# EAGLE board sensor1 (EAGLE 9.6.2)
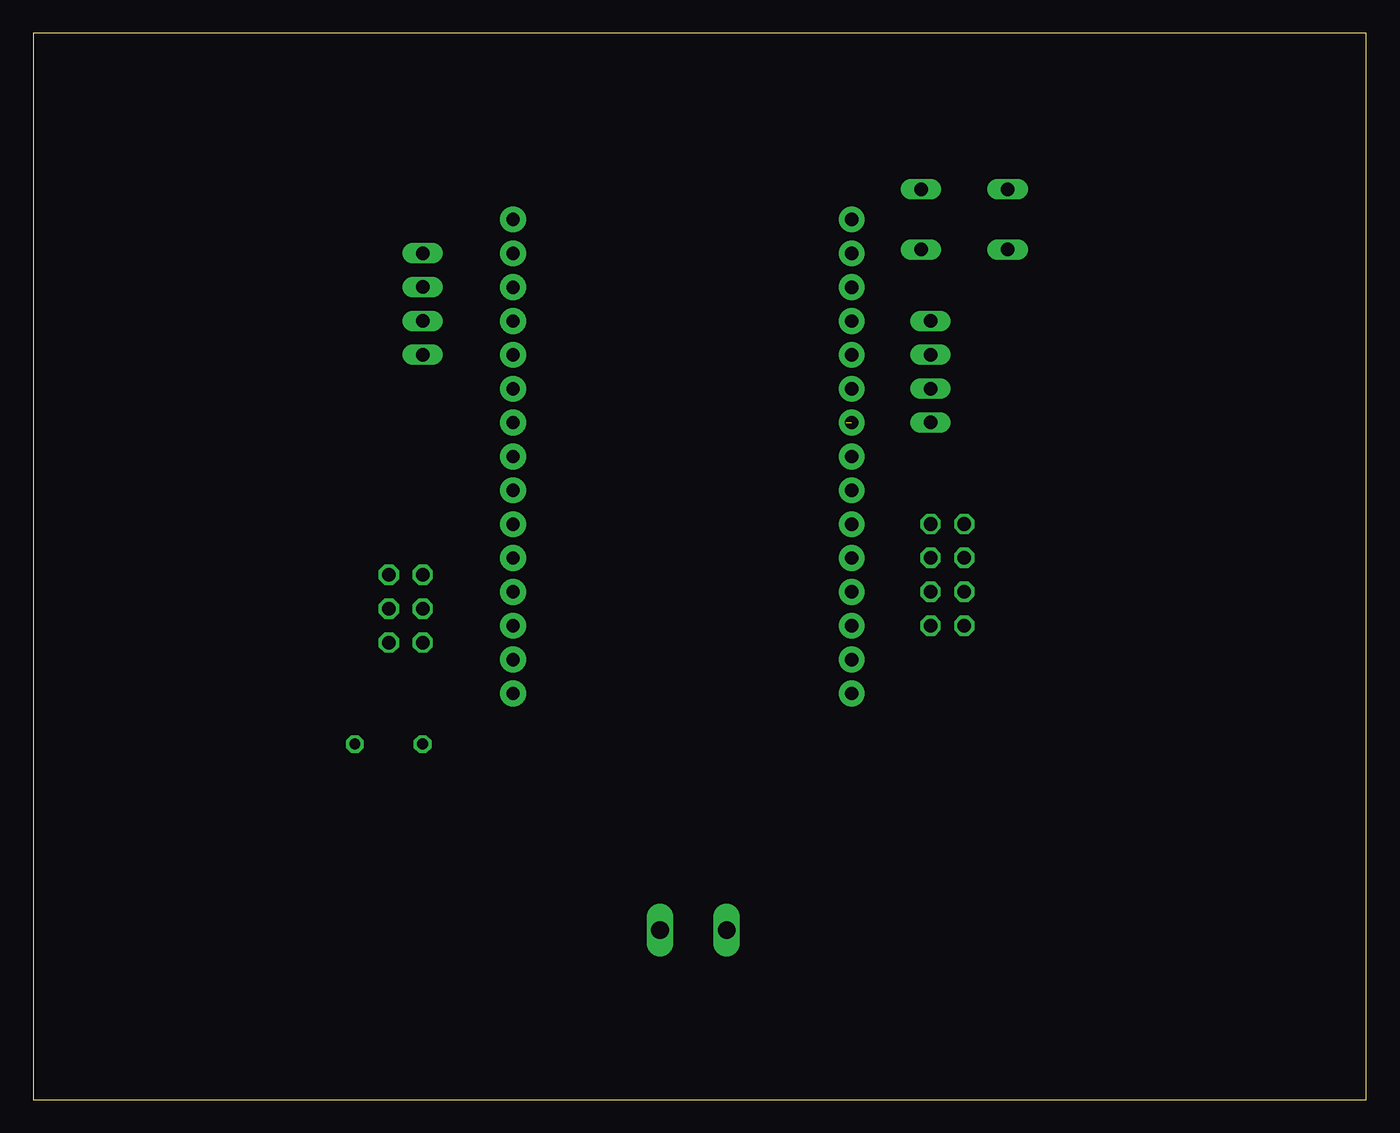
[diagram p0: board, top side]
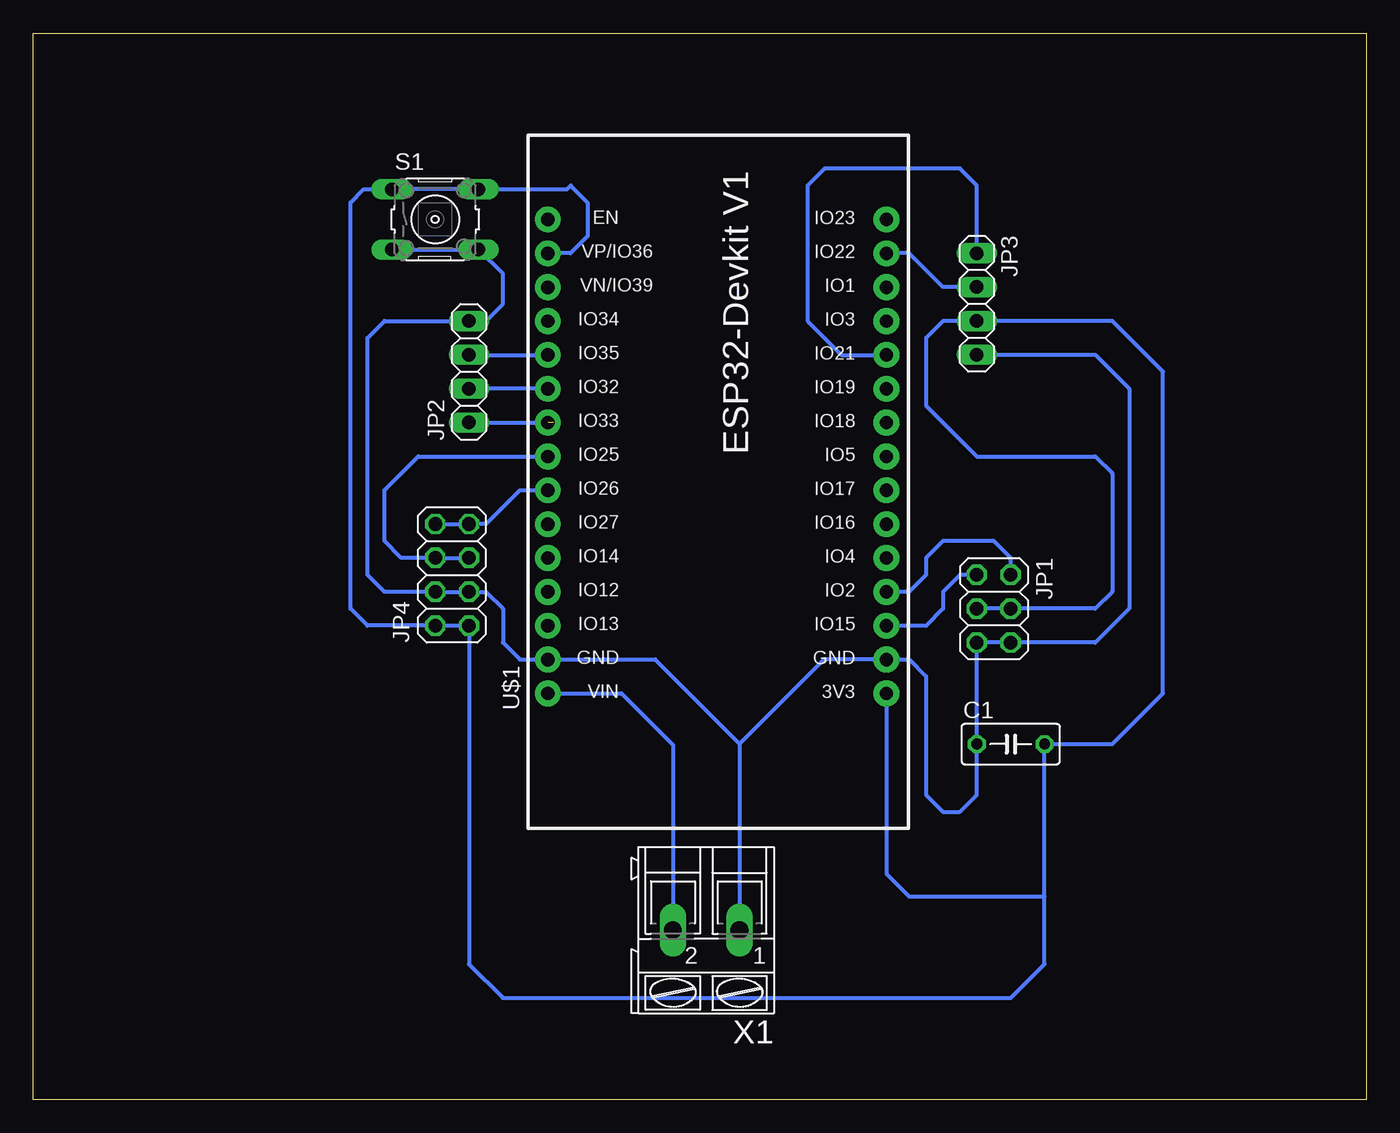
[diagram p1: board, bottom side, seen from below]

Size 100 x 80 mm. Coordinates in mm from the lower left corner, seen from the top.
Outline: 0,0 100,0 100,80 0,80 0,0
Copper layers (1*16): Top 0.035mm / dielectric 1.5mm / Bottom 0.035mm
Design rules "default": minimum track width 6mil, minimum drill 0.35mm, track to track 6mil, track to pad 6mil, pad to pad 6mil, via to via 6mil, smd to smd 6mil, copper to edge 40mil, drill to drill 6mil, minimum pad ring 10mil, minimum via ring 8mil, stop-mask expansion 4mil, vias tented up to drill 0mil, thermal gap 10mil

## Footprints (pad centres in the part's own frame; a part is rotated, then mirrored left to right if it is on the bottom)
C050-030X075 = drill 0.813 octagon: 1 -2.54,0; 2 2.54,0
2X03 = drill 1.016 octagon: 1 -2.54,-1.27; 2 -2.54,1.27; 3 0,-1.27; 4 0,1.27; 5 2.54,-1.27; 6 2.54,1.27
1X04 = drill 1.016 long: 1 -3.81,0; 2 -1.27,0; 3 1.27,0; 4 3.81,0
2X04 = drill 1.016 octagon: 1 -3.81,-1.27; 2 -3.81,1.27; 3 -1.27,-1.27; 4 -1.27,1.27; 5 1.27,-1.27; 6 1.27,1.27; 7 3.81,-1.27; 8 3.81,1.27
B3F-10XX = drill 1.016 long: 1 -3.251,2.261; 2 3.251,2.261; 3 -3.251,-2.261; 4 3.251,-2.261
ESP32-DEVKITV1 = drill 1 pad 1.93: 3V3 -16.52,-12.27; D1 13.96,-12.27; D2 -8.9,-12.27; D3 11.42,-12.27; D4 -6.36,-12.27; D5 1.26,-12.27; D12 -8.9,13.135; D13 -11.44,13.135; D14 -6.36,13.135; D15 -11.44,-12.27; D16 -3.82,-12.27; D17 -1.28,-12.27; D18 3.8,-12.27; D19 6.34,-12.27; D21 8.88,-12.27; D22 16.5,-12.27; D23 19.04,-12.27; D25 1.26,13.135; D26 -1.28,13.135; D27 -3.82,13.135; D32 6.34,13.135; D33 3.8,13.135; D34 11.42,13.135; D35 8.88,13.135; D36 16.5,13.135; D39 13.96,13.135; EN 19.04,13.135; GND@1 -13.98,13.135; GND@2 -13.98,-12.27; VIN -16.52,13.135
AK300/2 = drill 1.321 long: 1 -2.515,0; 2 2.489,0

## Placement (x,y rotation side)
C1  [C050-030X075]  26.67,26.67 0 bottom
JP1  [2X03]  27.94,36.83 270 bottom
JP2  [1X04]  67.31,54.61 90 bottom
JP3  [1X04]  29.21,59.69 270 bottom
JP4  [2X04]  68.58,39.37 90 bottom
S1  [B3F-10XX]  69.85,66.04 0 bottom
U$1  ESP32DEVKITV1  [ESP32-DEVKITV1]  48.26,46.99 90 bottom
X1  [AK300/2]  49.53,12.7 180 bottom

## Library data of the parts
C1 = rcl; SPICEPREFIX: C
JP1-JP4 = pinhead
S1 = switch-omron; MPN: B3F-1000; OC_FARNELL: 176432; OC_NEWARK: 36M3542
U$1 = esp32-devkitv1
X1 = con-ptr500; OC_FARNELL: unknown; OC_NEWARK: unknown

## Nets
GND: C1.1 JP1.5 JP1.6 JP2.4 JP3.4 JP4.3 JP4.4 S1.3 S1.4 U$1.GND@1 U$1.GND@2 X1.1
MOISTURE: JP1.2 U$1.D2
OUT1: JP2.1 U$1.D33
OUT2: JP2.2 U$1.D32
OUT3: JP2.3 U$1.D35
PH: JP1.1 U$1.D15
SCL: JP3.2 U$1.D22
SCL2: JP4.5 JP4.6 U$1.D25
SDA: JP3.1 U$1.D21
SDA2: JP4.7 JP4.8 U$1.D26
V: C1.2 JP1.3 JP1.4 JP3.3 JP4.1 JP4.2 S1.1 S1.2 U$1.3V3 U$1.D36
VIN: U$1.VIN X1.2

## Tracks (layer width: path | path; a pad name or v marks a point on that pad's centre or on a via)
GND
  Bottom 0.305: S1.3 S1.4 64.77,61.95 64.77,59.69 66.04,58.42 JP2.4 73.66,58.42 74.93,57.15 74.93,39.37 73.66,38.1 JP4.4 JP4.3 66.04,38.1 64.77,36.83 64.77,34.29 63.49,33.01 U$1.GND@1 57.16,33.01 57.15,33.02 53.34,33.02 47.02,26.7 47.02,26.67 | 47.02,26.67 X1.1 | 47.02,26.67 40.67,33.01 U$1.GND@2 34.28,33.01 33.02,31.75 33.02,22.86 31.75,21.59 30.48,21.59 29.21,22.86 C1.1 JP1.5 JP1.6 20.32,34.29 17.78,36.83 17.78,53.34 20.32,55.88 JP3.4
MOISTURE
  Bottom 0.305: JP1.2 26.67,40.64 27.94,41.91 31.75,41.91 33.02,40.64 33.02,39.37 34.3,38.09 U$1.D2
OUT1  (1 unrouted)
  Bottom 0.305: JP2.1 60.96,50.8
OUT2
  Bottom 0.305: U$1.D32 61.41,53.34 JP2.2
OUT3
  Bottom 0.305: JP2.3 U$1.D35
PH
  Bottom 0.305: JP1.1 30.48,39.37 31.75,38.1 31.75,36.83 33.03,35.55 U$1.D15
SCL
  Bottom 0.305: JP3.2 31.75,60.96 34.29,63.5 U$1.D22
SCL2
  Bottom 0.305: JP4.5 JP4.6 72.39,40.64 73.66,41.91 73.66,45.72 71.12,48.26 61.41,48.26 U$1.D25
SDA
  Bottom 0.305: JP3.1 29.21,68.58 30.48,69.85 40.64,69.85 41.91,68.58 41.91,58.42 39.36,55.87 U$1.D21
SDA2
  Bottom 0.305: JP4.8 JP4.7 66.04,43.18 63.51,45.71 U$1.D26
V
  Bottom 0.305: U$1.D36 59.7,63.49 58.42,64.77 58.42,67.31 59.69,68.58 59.97,68.3 S1.2 S1.1 75.21,68.3 76.2,67.31 76.2,36.83 74.93,35.56 JP4.2 JP4.1 67.31,10.16 64.77,7.62 26.67,7.62 24.13,10.16 24.13,15.24 | 24.13,15.24 C1.2 19.05,26.67 15.24,30.48 15.24,54.61 19.05,58.42 JP3.3 31.75,58.42 33.02,57.15 33.02,52.07 29.21,48.26 20.32,48.26 19.05,46.99 19.05,38.1 20.32,36.83 JP1.4 JP1.3 | U$1.3V3 35.99,16.94 34.29,15.24 24.13,15.24
VIN
  Bottom 0.305: U$1.VIN 55.87,30.47 52.02,26.62 X1.2